# Altium PCB PCBPIC80_A3979_4lvl.PcbDoc (part 1 of 2)
Units mm, origin at the board's own origin, x right, y up, seen from the top; angles counter-clockwise.
Board outline 150.1 x 100.1 mm, 4 copper layers (Top Layer, InternalPlane1, InternalPlane2, Bottom Layer); 110 components, 115 nets, 451 pads, 191 vias.
Unrouted connection lines stored in the file: 6.
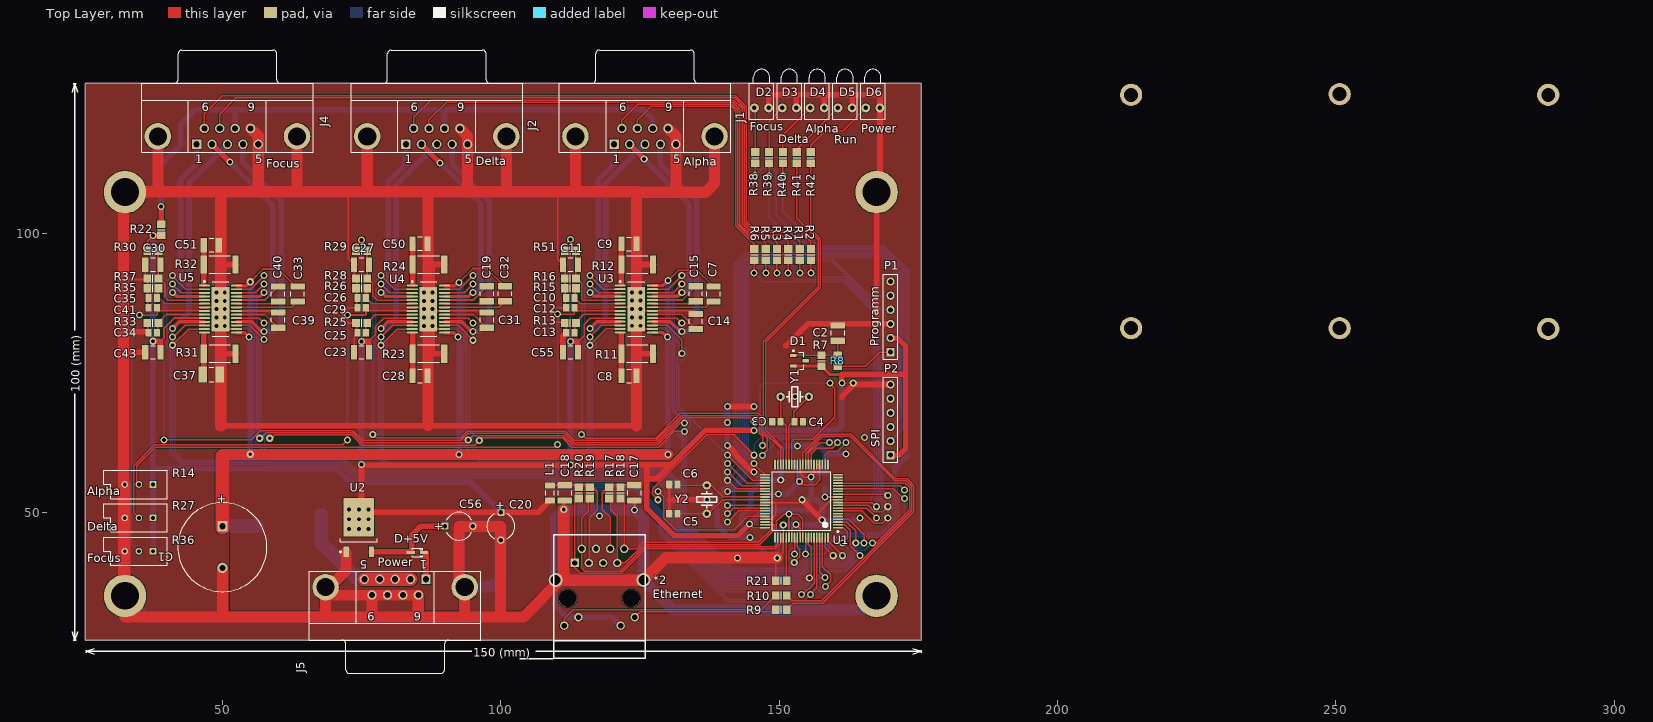
[diagram p0: Top Layer view]
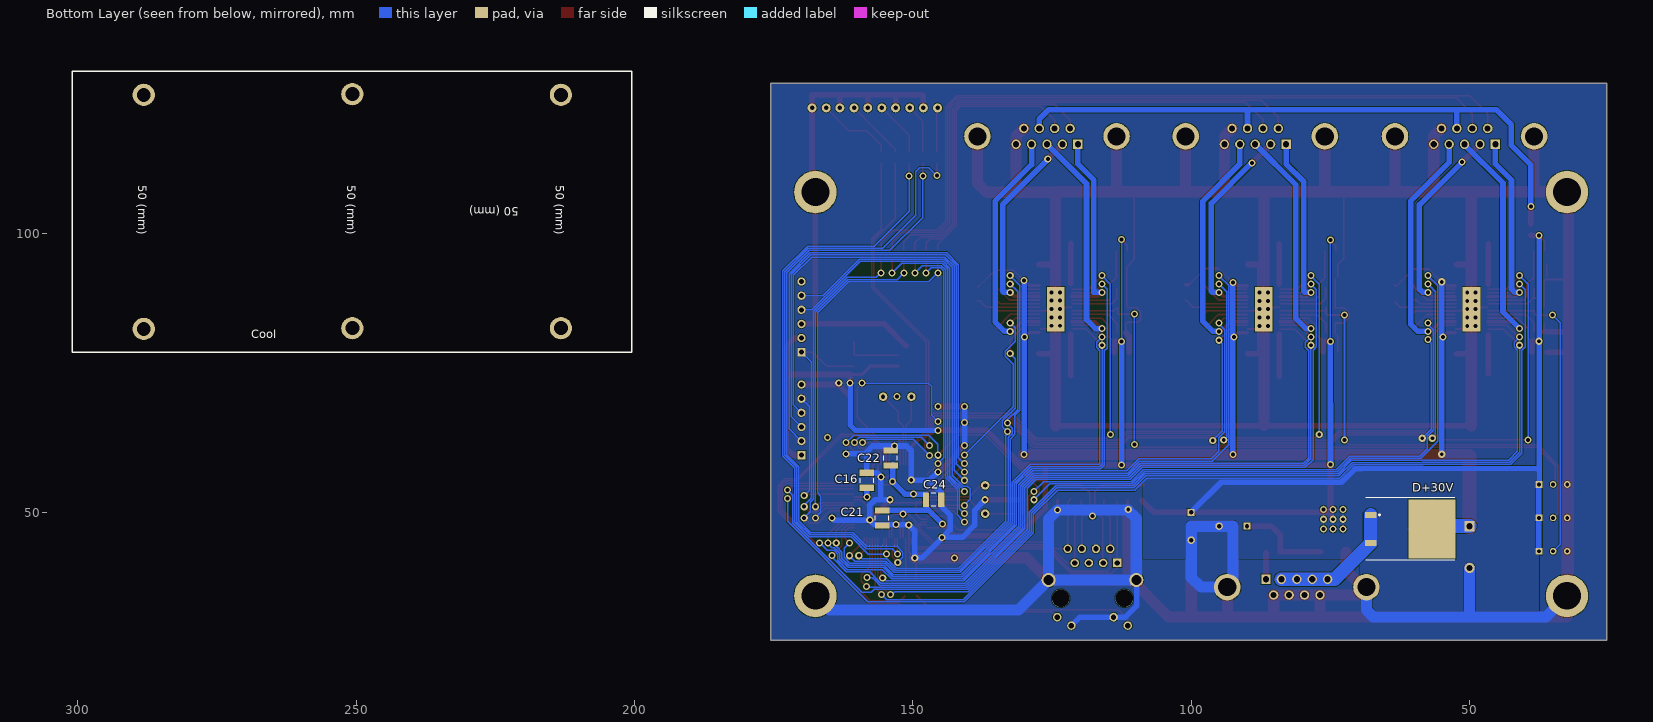
[diagram p1: Bottom Layer view, seen from below]
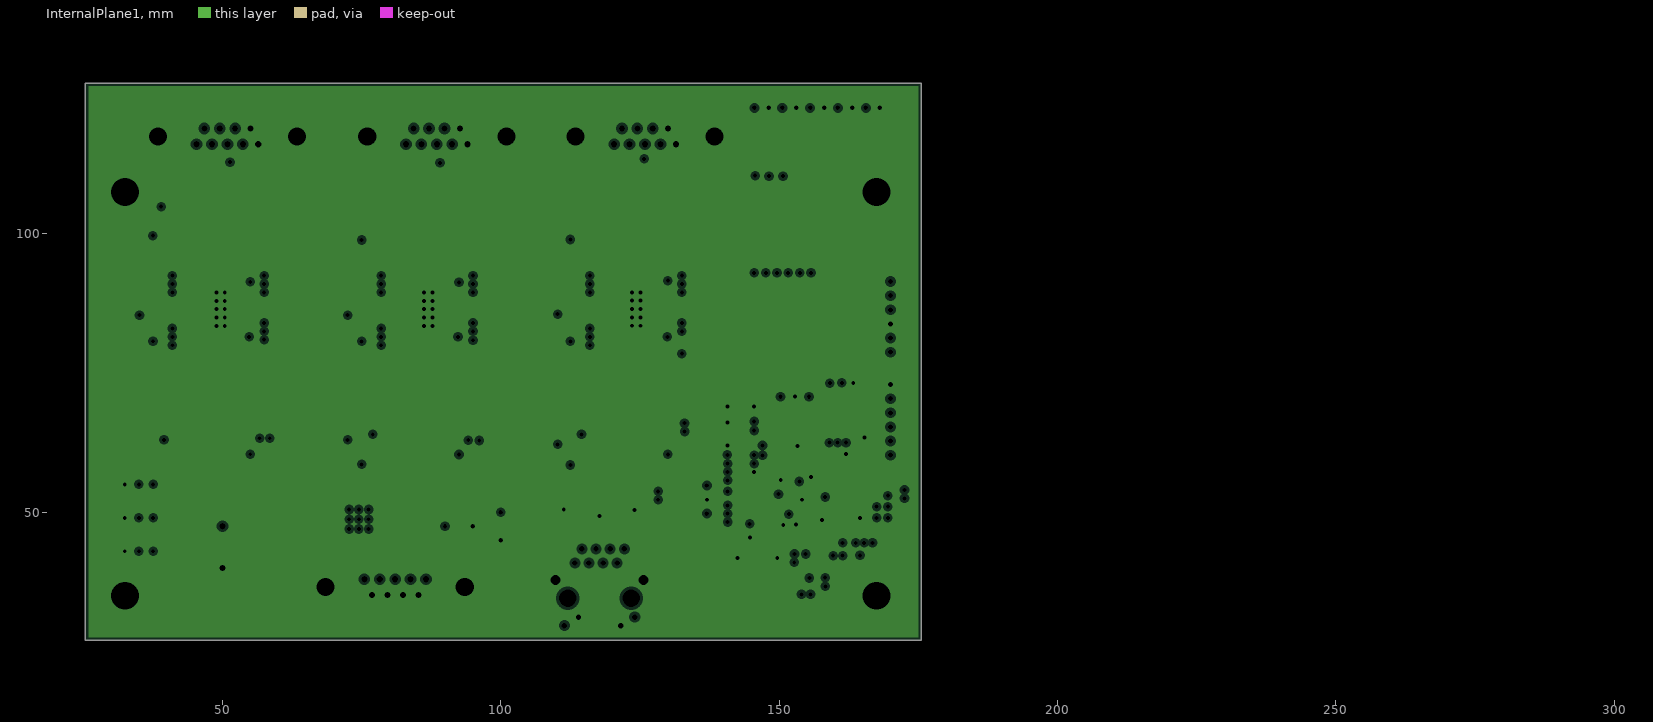
[diagram p2: InternalPlane1, clearances drawn from the general rule]
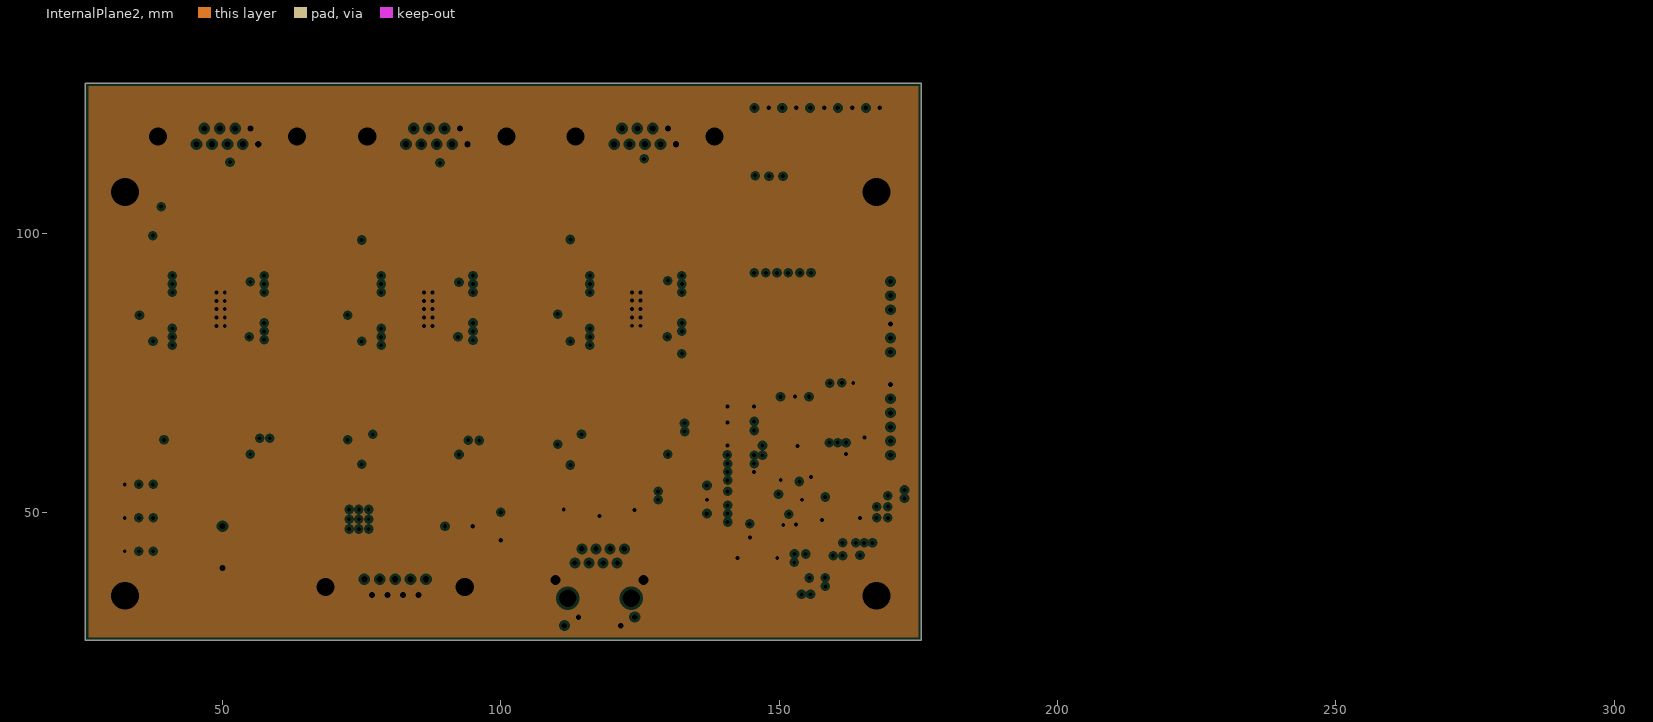
[diagram p3: InternalPlane2, clearances drawn from the general rule]

## Layer stack, top to bottom
Top Layer: signal copper 0.0356
Dielectric: prepreg 0.32, FR-4, Dk 4.8
InternalPlane1: plane copper 0.0356, net GND
Dielectric: core 0.32, FR-4, Dk 4.8
InternalPlane2: plane copper 0.0356, net GND
Dielectric: prepreg 0.32, FR-4, Dk 4.8
Bottom Layer: signal copper 0.0356

## Board outline
25.4,127.1 25.4,27 175.5,27 175.5,127.1 25.4,127.1

## Design rules (kind name [scope] priority, off if disabled: settings)
Clearance [All] p1: gap=0.127
PlaneClearance [All] p1: clearance=0.508
PlaneConnect [All] p1: planeconnectstyle=Relief reliefexpansion=0.508 reliefentries=4 reliefconductorwidth=0.254 reliefairgap=0.254
PolygonConnect [All] p1: connectstyle=Relief reliefconductorwidth=0.254 reliefentries=4 polygonreliefangle="90 Angle"
RoomDefinition SheetPIC80_A9379 [InComponentClass('SheetPIC80_A9379')] p1: confinementstyle=ConfineOut formatcopy=TRUE lockcomponents=FALSE outline 179,26.8 198.9,26.8 198.9,33.6 179,33.6
RoutingVias [All] p1: holewidth=0.711 width=1.27 viastyle="Through Hole" minholewidth=0.711 minwidth=1.27 maxholewidth=0.711 maxwidth=1.27
SilkscreenOverComponentPads [All] p1: minsilkscreentomaskgap=0.254
SolderMaskExpansion [All] p1: expansion=0.102
Width [All] p1: maxlimit=2.54 minlimit=0.254 preferedwidth=0.254
25 further rules are at their usual default settings.

## Components (designator, comment, footprint, x,y, rotation, side; value= is the part's Value field where it differs from the comment)
*2 "LU1T516-43" EthernetCON 117.729,34.544 r270 top
C1 "Cap Pol1" CAPPR7.5-16x35 50,43.75 r270 top
C2 "Cap" CAPC3225L 160.528,82.169 r270 top
C3 "Cap" CAPC2012L 149.5,66.25 r180 top
C4 "Cap" CAPC2012L 153.5,66.25 r180 top
C5 "Cap" CAPC2012L 131,49.75 r180 top
C6 "Cap" CAPC2012L 131,55 r0 top
C7 "Cap" CAPC3225L 138.2,89.2 r90 top
C8 "Cap" CAPC3225L 123,74.5 r180 top
C9 "Cap" CAPC3225L 123,98.2 r180 top
C10 "Cap" CAPC2012L 112.5,88.5 r0 top
C11 "Cap" CAPC3225L 112.5,94.5 r0 top
C12 "Cap" CAPC2012L 112.5,86.75 r0 top
C13 "Cap" CAPC2012L 112.5,82.25 r0 top
C14 "Cap" CAPC3225L 135,84.25 r270 top
C15 "Cap" CapC3225L 135,89.25 r270 top
C16 "Cap" CAPC3225L 158.25,55.75 r90 bottom
C17 "Cap" CAPC3225L 124,53.5 r90 top
C18 "Cap" CAPC3225L 111.5,53.5 r90 top
C19 "Cap" CAPC3225L 100.75,89.25 r90 top
C20 "Cap Pol1" CAPPR5-5x5 100,47.5 r270 top
C21 "Cap" CAPC3225L 155.5,49 r270 bottom
C22 "Cap" CAPC3225L 154,59.75 r90 bottom
C23 "Cap" CAPC3225L 75,78.75 r180 top
C24 "Cap" CAPC3225L 146.25,52.25 r180 bottom
C25 "Cap" CAPC2012L 75,82.25 r0 top
C26 "Cap" CAPC2012L 75,88.5 r0 top
C27 "Cap" CAPC3225L 75,94.5 r0 top
C28 "Cap" CAPC3225L 85.5,74.5 r180 top
C29 "Cap" CAPC2012L 75,86.75 r0 top
C30 "Cap" CAPC3225L 37.5,94.5 r0 top
C31 "Cap" CAPC3225L 97.5,84.5 r270 top
C32 "Cap" CAPC3225L 97.5,89.25 r270 top
C33 "Cap" CAPC3225L 63.5,89.2 r90 top
C34 "Cap" CAPC2012L 37.5,82.25 r0 top
C35 "Cap" CAPC2012L 37.5,88.5 r0 top
C37 "Cap" CAPC3225M 48,74.75 r180 top
C39 "Cap" CAPC3225L 60,84.5 r270 top
C40 "Cap" CAPC3225L 60,89.2 r270 top
C41 "Cap" CAPC2012L 37.5,86.75 r0 top
C43 "Cap" CAPC3225L 37.5,78.75 r180 top
C50 "Cap" CAPC3225L 85.5,98.25 r180 top
C51 "Cap" CAPC3225L 48,98 r180 top
C55 "Cap" CAPC3225L 112.5,78.75 r180 top
C56 "Cap Pol1" CAPPR5-5x5 92.5,47.5 r0 top
Cool "Cooler" "PCBComponent_1 - duplicate" 200.75,79 r0 bottom
D1 "Diode" SOT95P240-3N 153.67,77.216 r0 top
D2 "Focus" LED-1 146.825,122.625 r90 top
D3 "Delta" LED-1 151.825,122.625 r90 top
D4 "Alpha" LED-1 156.825,122.625 r90 top
D5 "Error" LED-1 161.825,122.625 r90 top
D6 "Power/run" LED-1 166.825,122.625 r90 top
D+5V "D Schottky" SOD-323 85,42.75 r0 top
D+30V "MBRB1545CT" D2PAK 62.25,47 r270 bottom
J1 "D Connector 9" D-SUB-9 125.9,116.1 r0 top
J2 "D Connector 9" D-SUB-9 88.5,116.1 r0 top
J4 "D Connector 9" D-SUB-9 50.9,116.1 r0 top
J5 "D Connector 9" D-SUB-9 81.026,37.973 r180 top
L1 "Inductor" INDC3216AL 108.839,53.467 r90 top
P1 "Программатор" HDR1X6 170,78.75 r90 top
P2 "SPI" HDR1X6 170,60.25 r90 top
R1 "Res2" RESC2012M 153.67,96.266 r270 top
R2 "Res2" RESC2012M 155.702,96.266 r270 top
R3 "Res2" RESC2012M 149.606,96.266 r270 top
R4 "Res2" RESC2012M 151.638,96.266 r270 top
R5 "Res2" RESC2012M 147.574,96.266 r270 top
R6 "Res2" RESC2012M 145.542,96.266 r270 top
R7 "Res2" RESC2012M 157.607,77.216 r270 top
R8 "Res2" RESC2012M 160.528,77.216 r90 top
R9 "Res2" RESC2012M 150.368,32.512 r180 top
R10 "Res2" RESC2012M 150.368,35.052 r180 top
R11 "Res2" RESC6332L 124.5,78.5 r180 top
R12 "Res2" RESC6332L 124.5,94.5 r180 top
R13 "Res2" RESC2012M 112.5,84 r0 top
R14 "RPot" VR5 35,55 r180 top
R15 "Res2" RESC2012M 112.5,90.25 r0 top
R16 "Res2" RESC2012M 112.5,92 r0 top
R17 "Res2" RESC2012M 119.5,53.5 r270 top
R18 "Res2" RESC2012M 121.5,53.5 r270 top
R19 "Res2" RESC2012M 116,53.5 r270 top
R20 "Res2" RESC2012M 114,53.5 r270 top
R21 "Res2" RESC2012M 150.368,37.719 r0 top
R22 "Res2" RESC2012M 39,100.75 r90 top
R23 "Res2" RESC6332L 87,78.5 r180 top
R24 "Res2" RESC6332L 87,94.5 r180 top
R25 "Res2" RESC2012M 75,84 r0 top
R26 "Res2" RESC2012M 75,90.25 r0 top
R27 "RPot" VR5 35,49 r180 top
R28 "Res2" RESC2012M 75,92 r0 top
R29 "Res2" RESC2012M 75,97 r0 top
R30 "Res2" RESC2012M 37.5,97 r0 top
R31 "Res2" RESC6332L 49.5,78.5 r180 top
R32 "Res2" RESC6332L 49.5,94.5 r180 top
R33 "Res2" RESC2012M 37.5,84 r0 top
R35 "Res2" RESC2012M 37.5,90.25 r0 top
R36 "RPot" VR5 35,43 r180 top
R37 "Res2" RESC2012M 37.5,92 r0 top
R38 "Res2" RESC2012M 145.675,113.7 r90 top
R39 "Res2" RESC2012M 148.175,113.7 r90 top
R40 "Res2" RESC2012M 150.675,113.7 r90 top
R41 "Res2" RESC2012M 153.175,113.7 r90 top
R42 "Res2" RESC2012M 155.675,113.7 r90 top
R51 "Res2" RESC2012M 112.5,97 r0 top
U1 "PIC18F87J60-I/PT" TQFP-PT80_N 154,52 r180 top
U2 "LM1117DT-3.3" TD03B_N 74.5,47.25 r90 top
U3 "A3979" "TSOP65P640_HS-28AM - duplicate" 124.339,86.501 r0 top
U4 "A3979" "TSOP65P640_HS-28AM - duplicate" 86.995,86.487 r0 top
U5 "A3979" "TSOP65P640_HS-28AM - duplicate" 49.657,86.487 r0 top
Y1 "XTAL" Quartz 150.25,70.75 r0 top
Y2 "XTAL" Quartz 137,49.75 r90 top

## Footprints (in the part's own frame and the unit in brackets; to place one, negate y for a bottom-side part, rotate by r counter-clockwise, add the part's x,y. Pads: shape width x height; smd on the part's side, far side on the other; paste and mask are expansions set on the pad)
CAPC2012L [mm] "Chip Capacitor, Body 2.0x1.3mm, IPC High Density"
  rect 1.1x1.4 smd: 1(-0.75,0) 2(0.75,0)
  body extent -1.1,-0.72 1.1,0.72, height 1.4
CAPC3225L [mm] "Chip Capacitor, Body 3.2x2.5mm, IPC High Density"
  rect 1.1x2.6 smd: 1(-1.35,0) 2(1.35,0)
  silkscreen extent -0.4,-1.2 0.4,1.2, body extent -1.7,-1.35 1.7,1.35, height 1.5
CapC3225L [mm] "Chip Capacitor, Body 3.2x2.5mm, IPC High Density"
  rect 1.1x2.6 smd: 1(-1.35,0) 2(1.35,0)
  silkscreen extent -0.4,-1.2 0.4,1.2, body extent -1.7,-1.35 1.7,1.35, height 1.5
CAPC3225M [mm] "Chip Capacitor, Body 3.2x2.5mm, IPC Low Density"
  rect 1.5x2.8 smd: 1(-1.55,0) 2(1.55,0)
  silkscreen extent -0.4,-1.3 0.4,1.3, body extent -1.7,-1.35 1.7,1.35, height 1.5
CAPPR5-5x5 [mm] "Capacitor, Electrolytic, Radial; Body 5 x 5 mm (Dia.xH typ); Pin Spacing 5 mm (typ)"
  rect 1.25x1.25 hole 0.75: 1(-2.5,0)
  round 1.35 hole 0.8: 2(2.5,0)
  silkscreen extent -2.26,-2.5 2.27,2.5
CAPPR7.5-16x35 [mm] "Capacitor, Electrolytic, Radial; Body 16 x 35 mm (Dia.xH typ); Pin Spacing 7.5 mm (typ)"
  rect 1.85x1.85 hole 1.1: 1(-3.75,0)
  round 1.85 hole 1.1: 2(3.75,0)
  silkscreen extent -8,-8 8,8
D2PAK [mm] "D2-PAK/TO-263-AB; 3 Leads (1 Cropped); Body 15.5 (inc. leads) x 10.5 mm (LxW max)"
  rect 1.05x2 smd: 1(-2.54,-5.5) 3(2.54,-5.5)
  rect 10.55x8.4 smd: 2(0,5.5)
  silkscreen extent -5.58,-6.4 5.58,9.6
D-SUB-9 [mm] "Connector"
  rect 1.69x1.69 hole 1.09: 1(-5.54,0)
  round 1.69 hole 1.09: 2(-2.77,0) 3(0,0) 4(2.77,0) 5(5.54,0) 6(-4.155,2.84) 7(-1.385,2.84) 8(1.385,2.84) 9(4.155,2.84)
  round 4.76 hole 3.26: 10(-12.495,1.42) 11(12.495,1.42)
  silkscreen extent -15.4,-1.48 15.4,16.92, body extent -15.49,-1.52 15.49,17.02, height 6.35
EthernetCON [mil] "Ethernet connector w/two LEDs"
  rect 60x60 hole 38: 1(-250,-175)
  round 60 hole 38: 2(-350,-125) 3(-250,-75) 4(-350,-25) 5(-250,25) 6(-350,75) 7(-250,125) 8(-350,175) 9(193,-249) 10(133,-149) 11(193,149) 12(133,249)
  round 100 hole 70: 13(-130,-310) 14(-130,310)
  round 125 hole 125 unplated: 15(0,-225) 16(0,225)
  silkscreen extent -450,-325 425,325, body extent -450,-325 425,325, height 550
HDR1X6 [mm] "Connector; Header; 6 Position"
  rect 1.5x1.5 hole 0.9: 1(0,0)
  round 1.5 hole 0.9: 2(2.54,0) 3(5.08,0) 4(7.62,0) 5(10.16,0) 6(12.7,0)
  silkscreen extent -1.27,-1.27 13.97,1.27
INDC3216AL [mm] "Chip Inductor, Body 3.2x1.6mm, IPC High Density"
  rect 1.1x1.8 smd: 1(-1.35,0) 2(1.35,0)
  silkscreen extent -0.4,-0.8 0.4,0.8, body extent -1.7,-0.9 1.7,0.9, height 0.55
LED-1 [mm] "Typical RED GaAs LED; 2 Leads"
  round 1.6 hole 0.8: 1(0,1.27) 2(0,-1.27)
  silkscreen extent -2,-2.2 6.95,2.2
"PCBComponent_1 - duplicate" [mm]
  round 4 hole 2.5: 1(12.446,-45.974) 2(49.911,-46.101) 3(87.376,-45.974) 4(87.376,-3.937) 5(49.911,-4.064) 6(12.446,-4.064)
  silkscreen extent -0.25,-50.25 100.25,0.25, body extent 0,-50.04 100.08,0, height 18
Quartz [mil]
  round 60 hole 30: 1(0,0) 2(200,0)
  silkscreen extent 40,-70 160,70, body extent -100,-100 300,100, height 90
RESC2012M [mm] "Chip Resistor, Body 2.0x1.2mm, IPC Low Density"
  rect 1.4x1.5 smd: 1(-1,0) 2(1,0)
  silkscreen extent 0,-0.65 0,0.65, body extent -1.07,-0.7 1.07,0.7, height 0.7
RESC6332L [mm] "Chip Resistor, Body 6.3x3.2mm, IPC High Density"
  rect 1.1x3.3 smd: 1(-2.85,0) 2(2.85,0)
  silkscreen extent -1.9,-1.55 1.9,1.55, body extent -3.22,-1.68 3.22,1.68, height 0.9
SOD-323 [mm] "SOD-323/SC-76; 2 Leads; Body 1.7 x 1.3 mm, (LxW)"
  rect 1.45x0.55 smd: 1(1.175,0) 2(-1.175,0)
  silkscreen extent -0.95,-0.75 0.95,0.75
SOT95P240-3N [mm] "SOT23, 3-Leads, Body 2.9x1.3mm, Pitch 0.95mm, Lead Span 2.4mm, IPC Medium Density"
  rect 1.15x0.6 smd: 1(-1.125,0.95) 2(-1.125,-0.95) 3(1.125,0)
  silkscreen extent -1.25,-1.5 0.7,1.92, body extent -0.7,-1.5 0.7,1.5, height 1.14
TD03B_N [mm] "D-PAK, 4-Leads, Body 6.1x6.6mm, Pitch 2.29mm, Lead Span 9.7mm, IPC Medium Density"
  rect 1.9x0.95 smd: 1(-4.35,2.28) 3(-4.35,-2.28)
  rect 6.9x5.5 smd: 4(1.85,0)
  silkscreen extent -4.47,-3.35 -2,3.43, body extent -2.5,-3.35 3.7,3.35, height 2.38
TQFP-PT80_N [mm] "Thin QFP, 80-Leads, Body 12x12mm, Pitch 0.5mm, IPC Medium Density"
  oval 1.8x0.3 smd: 1(-6.55,4.75) 2(-6.55,4.25) 3(-6.55,3.75) 4(-6.55,3.25) 5(-6.55,2.75) 6(-6.55,2.25) 7(-6.55,1.75) 8(-6.55,1.25) 9(-6.55,0.75) 10(-6.55,0.25) 11(-6.55,-0.25) 12(-6.55,-0.75) 13(-6.55,-1.25) 14(-6.55,-1.75) 15(-6.55,-2.25) 16(-6.55,-2.75) 17(-6.55,-3.25) 18(-6.55,-3.75) 19(-6.55,-4.25) 20(-6.55,-4.75) 41(6.55,-4.75) 42(6.55,-4.25) 43(6.55,-3.75) 44(6.55,-3.25) 45(6.55,-2.75) 46(6.55,-2.25) 47(6.55,-1.75) 48(6.55,-1.25) 49(6.55,-0.75) 50(6.55,-0.25) 51(6.55,0.25) 52(6.55,0.75) 53(6.55,1.25) 54(6.55,1.75) 55(6.55,2.25) 56(6.55,2.75) 57(6.55,3.25) 58(6.55,3.75) 59(6.55,4.25) 60(6.55,4.75)
  oval 0.3x1.8 smd: 21(-4.75,-6.55) 22(-4.25,-6.55) 23(-3.75,-6.55) 24(-3.25,-6.55) 25(-2.75,-6.55) 26(-2.25,-6.55) 27(-1.75,-6.55) 28(-1.25,-6.55) 29(-0.75,-6.55) 30(-0.25,-6.55) 31(0.25,-6.55) 32(0.75,-6.55) 33(1.25,-6.55) 34(1.75,-6.55) 35(2.25,-6.55) 36(2.75,-6.55) 37(3.25,-6.55) 38(3.75,-6.55) 39(4.25,-6.55) 40(4.75,-6.55) 61(4.75,6.55) 62(4.25,6.55) 63(3.75,6.55) 64(3.25,6.55) 65(2.75,6.55) 66(2.25,6.55) 67(1.75,6.55) 68(1.25,6.55) 69(0.75,6.55) 70(0.25,6.55) 71(-0.25,6.55) 72(-0.75,6.55) 73(-1.25,6.55) 74(-1.75,6.55) 75(-2.25,6.55) 76(-2.75,6.55) 77(-3.25,6.55) 78(-3.75,6.55) 79(-4.25,6.55) 80(-4.75,6.55)
  silkscreen extent -6.68,-5.25 5.25,5.57, body extent -6,-6 6,6, height 1.2
"TSOP65P640_HS-28AM - duplicate" [mm] "TSOP, 28-Leads, Body 9.7x4.4mm, Pitch 0.65mm, Exposed Pad, IPC Low Density"
  oval 2x0.35 smd: 1(-2.9,4.225) 2(-2.9,3.575) 3(-2.9,2.925) 4(-2.9,2.275) 5(-2.9,1.625) 6(-2.9,0.975) 7(-2.9,0.325) 8(-2.9,-0.325) 9(-2.9,-0.975) 10(-2.9,-1.625) 11(-2.9,-2.275) 12(-2.9,-2.925) 13(-2.9,-3.575) 14(-2.9,-4.225) 15(2.9,-4.225) 16(2.9,-3.575) 17(2.9,-2.925) 18(2.9,-2.275) 19(2.9,-1.625) 20(2.9,-0.975) 21(2.9,-0.325) 22(2.9,0.325) 23(2.9,0.975) 24(2.9,1.625) 25(2.9,2.275) 26(2.9,2.925) 27(2.9,3.575) 28(2.9,4.225)
  rect 3.15x8 all layers, no hole: 29(0,0)
  silkscreen extent -3.02,-4.9 1.5,5.07, body extent -2.25,-4.9 2.25,4.9, height 1.1
VR5 [mm] "Variable Resistor, Thru-Hole; 3 Leads"
  rect 1.2x1.2 hole 0.7: 1(-2.54,0)
  round 1.2 hole 0.7: 2(0,0) 3(2.54,0)
  silkscreen extent -5.08,-2.54 6.35,2.54

## Part data
C1 C20 C56: "Polarized Capacitor (Radial)"
C2 C3 C4 C5 C6 C7 C8 C9 C10 C11 C12 C13 C14 C15 C16 C17 C18 C19 C21 C22 C23 C24 C25 C26 C27 C28 C29 C30 C31 C32 C33 C34 C35 C37 C39 C40 C41 C43 C50 C51 C55: "Capacitor"
D1: "Default Diode"
D2 D3 D4 D5 D6: library part LED1, "Typical RED GaAs LED"
D+5V: "Schottky Diode"
D+30V: "Schottky Rectifier"
J1 J2 J4 J5: "Receptacle Assembly, 9 Position, Right Angle"
P1 P2: library part "Header 6", "Header, 6-Pin"
R1 R2 R3 R4 R5 R6 R7 R8 R9 R10 R11 R12 R13 R15 R16 R17 R18 R19 R20 R21 R22 R23 R24 R25 R26 R28 R29 R30 R31 R32 R33 R35 R37 R38 R39 R40 R41 R42 R51: "Resistor"
R14 R27 R36: "Potentiometer"
U1: "High Performance, 1-Mbit Flash Microcontroller with Ethernet, 128K Flash, 80-Pin TQFP, Industrial Temperature Range"
U2: "800mA Low-Dropout Linear Regulator"
U3 U4 U5: "Microstepping DMOS Driver with Translator 2.5A"
Y1 Y2: "Crystal Oscillator"

## Free pads (board coordinates)
  round 7.62 hole 5: 1(32.5,35) 1(32.5,107.5) 1(167.5,35) 1(167.5,107.5)

## Via types
v1: diameter 1.27, hole 0.711, Top Layer to Bottom Layer, 191 vias

## Nets (pads, with @x,y where several pads share a name; then routed paths per layer and width w, separated by ;. In a path a pad name is that pad's centre, name@x,y a point inside that pad or via, vN(x,y) a via of type N, cw(c..) or ccw(c..) an arc to the next point about the centre after c; other vN are vias at no path point)
+5: C56.1 D+5V.2 U2.3 | length 16.9
  Top Layer w1: U2.3@76.78,42.9 84,42.9 84,45.9 85.6,47.5 C56.1@90,47.5
+30: C1.1 C7.2 C19.2 C33.2 D+30V.2 U3.15 U3.28 U4.15 U4.28 U5.15 U5.28 | length 241.6
  Top Layer w0.3: v1@54.8,91.5 55.1,91.5 57.3,93.7 60.034,93.7 C33.2@63.192,90.542 ; v1@92.35,91.45 92.65,91.45 95,93.8 97.434,93.8 C19.2@100.384,90.85 ; v1(130,91.6) 131.9,93.5 135.234,93.5 C7.2@138.192,90.542
  Top Layer w0.35: C33.2@63.192,90.542 C33.2@63.5,90.85
  Top Layer w0.6: U5.15@52.557,82.262 54.038,82.262 v1(54.8,81.5) ; U5.28@52.557,90.712 54.312,90.712 v1@55.1,91.5 ; U4.15@89.895,82.262 91.538,82.262 v1(92.3,81.5) ; U4.28@89.895,90.712 91.762,90.712 v1@92.5,91.45 ; C19.2@100.384,90.85 C19.2@101,90.85 ; U3.15@127.239,82.276 129.124,82.276 129.8,81.6 v1(129.9,81.5) ; U3.28@127.239,90.726 129.126,90.726 v1(130,91.6)
  Top Layer w2: 50,60.1 50.3,60.4 v1(130,60.4)
  Top Layer w2.5: C1.1@50,47.3 50,60.1
  Bottom Layer w1: v1@55,60.7 v1@55,91.5 ; v1(92.3,81.5) v1@92.5,81.5 ; v1(92.5,60.375) v1@92.5,81.5 ; v1(92.5,91.3) v1@92.5,81.5 ; v1(129.9,81.5) v1@129.9,81.6 ; v1(130,60.4) v1(130,91.6)
  Bottom Layer w2.5: C1.1@50,47.56 D+30V.2@56.19,47.56
  other v1: 55,60.425 55,91.4
ALFA_OUT1A: J1.1 U3.4 | length 35
  Top Layer w0.6: v1(116,89.5) 116.724,88.776 U3.4@121.439,88.776
  Bottom Layer w1: v1(116,89.5) 116.285,89.5 117.473,89.5 117.473,109.673 120.36,112.56 J1.1@120.36,116.1
ALFA_OUT1B: J1.2 U3.25 | length 37.9
  Top Layer w0.6: U3.25@127.239,88.776 131.776,88.776 v1(132.5,89.5)
  Top Layer w1: J1.2@123.13,116.1 v1(125.755,113.475)
  Bottom Layer w1: v1(125.755,113.475) 125.755,113.351 133.873,105.233 133.873,89.673 133.7,89.5 v1(132.5,89.5)
ALFA_OUT2A: J1.3 U3.11 | length 43.9
  Top Layer w0.6: v1(116,83) 117.226,84.226 U3.11@121.439,84.226
  Bottom Layer w1: v1(116,83) 117.2,83 118.8,84.6 118.8,109 J1.3@125.9,116.1
ALFA_OUT2B: J1.4 U3.18 | length 44
  Top Layer w0.6: U3.18@127.239,84.226 130.474,84.226 132.2,82.5 v1(132.5,82.5) v1(132.5,82.5)
  Bottom Layer w1: J1.4@128.67,116.1 128.67,112.43 135.2,105.9 135.2,84.2 133.5,82.5 v1(132.5,82.5)
ALPHA_LED: D4.1 R40.2 | length 9.9
  Top Layer w0.254: R40.2@150.675,114.7 150.675,117.745 D4.1@155.555,122.625
DELTA_LED: D3.1 R39.2 | length 8.9
  Top Layer w0.254: R39.2@148.175,114.7 148.175,120.245 D3.1@150.555,122.625
DELTA_OUT1A: J2.1 U4.4 | length 35
  Top Layer w0.6: v1(78.5,89.5) 79.238,88.762 U4.4@84.095,88.762
  Bottom Layer w1: v1(78.5,89.5) 79.6,89.5 79.773,89.673 79.773,109.373 82.96,112.56 J2.1@82.96,116.1
DELTA_OUT1B: J2.2 U4.25 | length 38
  Top Layer w0.6: U4.25@89.895,88.762 94.262,88.762 v1(95,89.5)
  Top Layer w1: J2.2@85.73,116.1 v1(89.08,112.75)
  Bottom Layer w0.6: J2.2@85.73,116.1 J2.2@85.73,116.352
  Bottom Layer w1: v1@89.048,112.802 96.373,105.477 96.373,89.673 96.2,89.5 v1(95,89.5)
DELTA_OUT2A: J2.3 U4.11 | length 43.9
  Top Layer w0.6: v1(78.5,83) 79.712,84.212 U4.11@84.095,84.212
  Bottom Layer w1: v1(78.5,83) 79.4,83 81.2,84.8 81.2,108.8 J2.3@88.5,116.1
DELTA_OUT2B: J2.4 U4.18 | length 44
  Top Layer w0.6: U4.18@89.895,84.212 92.988,84.212 94.7,82.5 94.969,82.5 v1(95,82.5)
  Bottom Layer w1: J2.4@91.27,116.1 91.27,112.53 97.9,105.9 97.9,84.3 96.1,82.5 v1(95,82.5)
DIRALFA: U1.17 U3.3 | length 132.9
  Top Layer w0.254: v1(116,91) 117.574,89.426 U3.3@121.439,89.426 ; U1.17@160.55,55.25 161.65,55.25 168.415,55.25 170.585,55.25 172.672,55.25 173.438,54.484 173.438,50.438 167.5,44.5 v1(166.75,44.5)
  Bottom Layer w0.254: v1(116,91) 115.1,90.1 115.1,79.5 115.6,79 115.6,58.447 116.247,57.8 128.658,57.8 131.375,55.083 131.375,47.631 140.962,38.044 153.795,38.044 155.457,39.706 161.78,39.706 163.496,41.422 163.496,42.503 164.132,43.139 165.389,43.139 v1(166.75,44.5)
DIRDELTA: U1.16 U4.3 | length 169.9
  Top Layer w0.254: v1(78.5,91) 80.088,89.412 U4.3@84.095,89.412 ; U1.16@160.55,54.75 171.75,54.75 v1(172.5,54)
  Bottom Layer w0.254: v1(78.5,91) 77.5,90 77.5,79.7 78.1,79.1 78.1,59.472 79.513,58.059 95.701,58.059 108.786,58.059 108.878,57.967 110.95,55.895 127.869,55.895 129.47,54.294 129.47,46.842 140.173,36.139 154.584,36.139 156.961,36.139 157.5,35.6 159.161,35.6 171.6,48.039 171.6,53.1 v1(172.5,54)
DIRFOCUS: U1.15 U5.3 | length 205.1
  Top Layer w0.254: v1(41,91) 42.588,89.412 U5.3@46.757,89.412 ; U1.15@160.55,54.25 170.507,54.25 171.138,53.619 172.257,52.5 v1(172.5,52.5)
  Bottom Layer w0.254: v1(41,91) 40,90 40,79.7 40.6,79.1 40.6,60.647 42.647,58.6 58.284,58.6 58.33,58.554 70.912,58.554 73.312,56.154 94.912,56.154 107.997,56.154 110.161,53.99 124.01,53.99 128.327,49.673 128.327,46.369 140.745,33.95 158.05,33.95 172.5,48.4 v1(172.5,52.5)
ENABLE: U1.80 U3.26 U4.26 U5.26 | length 236.7
  Top Layer w0.254: U5.26@52.557,89.412 55.912,89.412 v1(57.5,91) ; v1@56.7,63.1 57.901,64.301 73.377,64.301 75.178,62.5 93.7,62.5 94.114,62.914 v1(94.15,62.95) 94.989,63.789 111.233,63.789 112.933,62.089 128.205,62.089 132.216,66.1 v1@133.1,66.1 ; U4.26@89.895,89.412 93.412,89.412 v1(95,91) ; U3.26@127.239,89.426 130.926,89.426 v1(132.5,91) ; U1.80@158.75,45.45 158.75,44.85 160.1,43.5 v1(161.4,42.2)
  Bottom Layer w0.254: v1@56.7,63.1 56.138,63.662 56.138,89.638 v1@57.071,90.571 ; v1@93.8,63.3 93.635,63.465 93.635,89.635 94.757,90.757 95,90.757 v1(95,91) ; v1(132.5,91) 131.181,89.681 131.181,68.458 133,66.639 v1(133,66) 132.124,65.124 132.124,64.145 132.645,63.624 132.651,63.624 132.899,63.376 132.899,48.262 141.593,39.568 153.164,39.568 154.07,40.474 154.826,41.23 158.769,41.23 160.43,41.23 v1(161.4,42.2)
  other v1: 56.7,63.3
ERROR_LED: D5.1 R41.2 | length 11
  Top Layer w0.254: R41.2@153.175,114.7 153.175,115.245 156.68,118.75 D5.1@160.555,122.625
FOCUS_LED: D2.1 R38.2 | length 7.8
  Top Layer w0.254: R38.2@145.675,114.7 D2.1@145.675,122.505
FOCUS_OUT1A: J4.1 U5.4 | length 34.7
  Top Layer w0.6: v1(41,89.5) 41.738,88.762 U5.4@46.757,88.762
  Bottom Layer w1: v1@41.3,89.5 41.9,89.5 42.473,90.073 42.473,109.673 45.36,112.56 J4.1@45.36,116.1
FOCUS_OUT1B: J4.2 U5.25 | length 37.5
  Top Layer w0.6: U5.25@52.557,88.762 56.762,88.762 v1(57.5,89.5)
  Top Layer w1: J4.2@48.13,116.1 v1(51.355,112.875)
  Bottom Layer w1: v1@51.386,112.84 59,105.225 59,90.1 58.4,89.5 v1(57.5,89.5)
FOCUS_OUT2A: J4.3 U5.11 | length 43.5
  Top Layer w0.6: v1(41,83) 42.212,84.212 U5.11@46.757,84.212
  Bottom Layer w1: v1(41,83) 44,86 44,109.106 50.9,116.006 J4.3@50.9,116.1
FOCUS_OUT2B: J4.4 U5.18 | length 44.5
  Top Layer w0.6: U5.18@52.557,84.2 55.3,84.2 57,82.5 v1(57.5,82.5)
  Bottom Layer w1: J4.4@53.67,116.1 53.67,112.83 60.6,105.9 60.6,83.8 59.3,82.5 v1(57.5,82.5)
GND: *2.10 *2.11 *2.13 *2.14 C1.2 C2.1 C3.2 C4.1 C5.2 C6.1 C8.1 C9.1 C10.1 C11.1 C12.1 C13.1 C14.1 C16.2 C17.1 C18.1 C20.2 C21.2 C22.2 C23.2 C24.2 C25.1 C26.1 C27.1 C28.1 C29.1 C30.1 C31.1 C34.1 C35.1 C37.1 C39.1 C41.1 C43.2 C50.1 C51.1 C55.2 C56.2 Cool.1 Cool.2 Cool.3 Cool.4 Cool.5 Cool.6 D2.2 D3.2 D4.2 D5.2 D6.2 J1.5 J1.9 J1.10 J1.11 J2.5 J2.9 J2.10 J2.11 J4.5 J4.9 J4.10 J4.11 J5.6 J5.7 J5.8 J5.9 J5.10 J5.11 P1.3 P2.6 pad.1 R11.1 R12.1 R13.1 R14.3 R15.1 R16.1 R21.1 R23.1 R24.1 R25.1 R26.1 R27.3 R28.1 R31.1 R32.1 R33.1 R35.1 R36.3 R37.1 U1.11 U1.26 U1.31 U1.51 U1.57 U1.64 U1.67 U1.70 U2.1 U3.7 U3.16 U3.21 U3.29 U4.7 U4.16 U4.21 U4.29 U5.7 U5.16 U5.21 U5.29 | length 1476.3
  Top Layer w0.254: R37.1@36.15,92.35 C30.1@36.15,94.5 ; 50.5,78.5 U5.29@50.5,84 ; U5.29@50.5,89 50.5,94.5 ; U5.29@50.675,86.175 U5.21@52.4,86.175 ; C39.1@59.675,86.175 C39.1@60,85.85 ; 88,78.5 U4.29@88,84 ; U4.29@88,89 88,94.5 ; U4.29@88.175,86.175 89.9,86.175 97.175,86.175 C31.1@97.5,85.85 ; 110.2,107.32 110.2,95.45 111.6,94.05 111.6,92 C12.1@111.6,86.9 ; C12.1@111.489,86.489 111.278,86.7 109.8,86.7 109.1,86 109.1,84.6 109.6,84.1 111.5,84.1 R13.1@111.75,83.85 ; C13.1@111.75,82.25 R13.1@111.75,83.85 ; 111.75,83.1 R13.1@111.75,83.85 ; U3.7@121.439,86.826 U3.29@124.374,86.826 ; U3.29@124.526,82.926 U3.16@127.239,82.926 ; U3.29@124.576,86.176 U3.21@127.239,86.176 ; U3.21@127.239,86.175 134.675,86.175 C14.1@135,85.85 ; 148.55,48.75 149.4,49.6 149.4,51.75 153.575,51.75 ; R21.1@149.4,37.719 149.4,41.5 150.75,42.85 U1.64@150.75,45.45 ; v1(150.725,47.75) v1@150.75,47.725 ; 152.25,47.025 v1(153,47.775) 153.75,47.025 ; 153.75,57.05 154.475,56.325 155.675,56.325 v1(155.725,56.375) 156.25,56.9 ; 156.7,49.625 159.324,52.25 ; C2.1@160.528,83.619 C2.1@160.739,83.83
  Top Layer w0.3: 32,91.8 32.25,91.8 36.4,91.8 36.6,91.6 36.6,90.25 C41.1@36.6,86.75 ; C34.1@36.6,82.4 R33.1@36.6,84 ; U5.7@46.757,86.812 U5.29@49.332,86.812 ; U5.29@49.812,82.912 U5.16@52.557,82.912 ; 72.6,107.474 72.6,95.55 C27.1@73.65,94.5 R28.1@73.65,92.35 ; C23.2@73.65,78.75 73.65,81.65 C25.1@74.25,82.25 ; C25.1@74.1,82.4 74.1,84 72.61,84 71.588,85.022 71.588,85.778 72.56,86.75 C29.1@74.25,86.75 ; C29.1@74.1,86.9 R28.1@74.1,92 ; U4.7@84.095,86.812 U4.29@86.799,86.812 ; U4.29@87.023,82.912 U4.16@89.895,82.912 ; U1.57@147.45,48.75 148.55,48.75 ; U1.51@147.45,51.75 149.4,51.75 ; U1.64@150.75,45.45 v1@150.75,47.725 ; U1.67@152.25,45.45 152.25,47.025 ; U1.70@153.75,45.45 153.75,47.025 ; 153.75,57.05 U1.31@153.75,58.55 ; 156.25,56.9 U1.26@156.25,58.55 ; 159.324,52.25 U1.11@160.55,52.25
  Top Layer w0.35: U5.21@52.4,86.175 C39.1@59.675,86.175
  Top Layer w0.5: v1@111.379,50.579 C18.1@111.379,52.117 ; v1(124,50.4) C17.1@124,52.15 ; C5.2@130.25,49.75 C6.1@130.25,55
  Top Layer w1: 32.25,82.4 C34.1@36.6,82.4 ; 32.3,78.75 C43.2@36.15,78.75 ; 50.5,78.5 R31.1@52.35,78.5 ; 50.5,94.5 R32.1@52.35,94.5 ; 88,78.5 R23.1@89.85,78.5 ; 88,94.5 R24.1@89.85,94.5 ; C55.2@111.15,78.75 111.15,81.65 C13.1@111.75,82.25 ; 124.4,94.5 R12.1@127.35,94.5 ; 124.5,78.5 R11.1@127.35,78.5 ; 130.3,52.25 v1(137,52.25) ; v1(140.7,62) 140.785,62 141.962,60.823 141.962,60.503 144.977,57.488 145.262,57.488 v1(145.5,57.25) ; v1(140.7,69) v1(145.5,69) ; D2.2@148.095,122.625 148.095,124.795 148.3,125 168.1,125 D6.2@168.1,122.63 ; 151.2,79.9 155.13,83.83 P1.3@170,83.83 ; 153.095,124.795 D3.2@153.095,122.625 D3.2@153.2,122.73 ; v1(154.075,52.25) 156.7,49.625 v1(157.725,48.6) ; D4.2@158.095,122.625 158.095,124.995 ; 161.2,70.7 163.45,72.95 P2.6@170,72.95 ; D5.2@163.095,122.625 163.095,124.995 ; 167.5,83.93 pad.1@167.5,107.5 168.1,108.1 D6.2@168.1,122.63 ; D6.2@168.095,122.625 D6.2@168.1,122.63 ; 49.743,65.555 124.357,65.555 49.743,65.555
  Top Layer w2: pad.1@32.123,107.574 124.476,107.574 ; pad.1@32.25,35.25 32.25,55 32.25,91.8 pad.1@32.25,107.5 ; pad.1@32.46,35.04 R14.3@32.46,55 ; pad.1@32.5,35 32.5,31.225 50,31.225 ; 38.405,107.705 J4.10@38.405,117.52 ; 49.7,107.574 49.7,65.512 ; C1.2@50,39.94 50,31.225 ; J4.9@55.055,118.94 56.44,117.555 J4.5@56.44,116.1 56.44,107.614 ; 63.395,107.669 J4.11@63.395,117.52 ; 68.531,31.386 J5.11@68.531,36.553 ; U2.1@72.22,42.9 72.22,39.52 69.253,36.553 J5.11@68.531,36.553 ; 76.005,107.779 J2.10@76.005,117.52 ; 76.871,31.426 J5.9@76.871,35.133 ; 85.181,31.568 J5.6@85.181,35.133 J5.9@76.871,35.133 ; 86.911,65.564 86.911,107.5 ; J5.10@92.5,37.574 92.5,47.5 C56.2@95,47.5 100,47.5 100,31.4 ; J2.9@92.655,118.94 94.04,117.555 J2.5@94.04,116.1 94.04,107.514 ; J5.10@93.5,36.574 93.5,31.225 ; 100.995,107.769 J2.11@100.995,117.52 ; 104.1,31.225 93.5,31.225 ; 104.238,31.363 *2.13@110.671,37.796 ; *2.13@109.905,37.796 *2.13@110.671,37.796 ; v1(111.3,50.5) 111.3,37.846 110.721,37.846 *2.13@110.671,37.796 ; 113.405,107.579 J1.10@113.405,117.52 ; 124.4,107.2 124.4,65.512 ; 124.4,107.447 124.4,65.512 ; 124.4,107.474 136.774,107.474 138.395,109.095 J1.11@138.395,117.52 ; J1.9@130.055,118.94 131.44,117.555 J1.5@131.44,116.1 131.44,107.614 ; v1(149.65,41.825) v1(142.5,41.825) 129.582,41.825 *2.14@125.603,37.846 125.553,37.796 *2.13@110.671,37.796 ; 49.7,65.512 49.743,65.555 49.7,65.512 ; 50,31.225 93.5,31.225 ; J5.11@68.531,36.553 69.951,35.133 J5.9@76.871,35.133 ; 124.4,65.512 124.357,65.555 124.4,65.512
  Bottom Layer w1: *2.13@109.799,37.79 109.799,33.201 111.834,31.166 *2.10@113.944,31.166 119.99,31.166 *2.11@121.514,29.642 ; v1(137,52.25) 138.9,50.35 138.9,47.7 141.1,45.5 v1@144.7,45.5 ; v1(140.7,62) v1(140.7,66.1) v1(140.7,69) ; v1(144.75,45.5) v1@144.7,45.5 ; v1(145.5,57.25) 146.975,55.775 ; v1(154.075,52.25) 155.625,52.25 ; 158.6,60.5 v1(162,60.5) ; v1(164.5,49) 164.1,48.6 v1(157.725,48.6) ; v1@144.7,45.5 143.3,46.9 143.3,49.5 144.9,51.1 C24.2@144.9,52.25 144.9,53.6 147.075,55.775 v1(150.275,55.775) 150.275,61.046 151.129,61.9 v1(153.3,61.9) 157.2,61.9 158.25,60.85 C16.2@158.25,57.1 156.45,57.1 v1(155.725,56.375) 155.725,52.35 155.625,52.25 ; v1@144.7,45.5 148.375,41.825 v1(149.65,41.825) 149.65,46.675 v1(150.725,47.75) 156.875,47.75 v1(157.725,48.6) ; 155.625,52.25 156.75,52.25 157.725,51.275 v1(157.725,48.6)
  Bottom Layer w2: pad.1@32.5,35 36.3,31.2 50,31.2 ; C1.2@50,39.94 50,31.2 ; J5.11@68.531,36.553 68.531,32.431 67.3,31.2 50,31.2 ; J5.10@92.5,37.574 92.5,47.5 100,47.5 100,38.3 98.253,36.553 J5.10@93.521,36.553 ; pad.1@167.5,35 164.947,32.447 131.002,32.447 *2.14@125.603,37.846 ; *2.14@125.603,37.846 125.603,48.797 v1(124,50.4) 111.4,50.4 109.855,48.855 *2.13@109.855,37.846 *2.14@125.603,37.846
  other v1: 117.75,49.325 165.3,63.4 152.8,70.8 163.3,73.2 48.895,83.487 50.419,83.487 86.233,83.487 87.757,83.487 123.577,83.501 125.101,83.501 48.895,84.987 50.419,84.987 86.233,84.987 87.757,84.987 123.577,85.001 125.101,85.001 48.895,86.487 50.419,86.487 86.233,86.487 87.757,86.487 123.577,86.501 125.101,86.501 48.895,87.987 50.419,87.987 86.233,87.987 87.757,87.987 123.577,88.001 125.101,88.001 48.895,89.487 50.419,89.487 86.233,89.487 87.757,89.487 123.577,89.501 125.101,89.501
HOME_ALFA: U1.27 U4.2 | length 136.1
  Top Layer w0.254: v1(77,64) 77.59,63.41 92.814,63.41 93.955,64.551 111.549,64.551 113.2,62.9 127.939,62.9 132.42,67.381 146.019,67.381 146.395,67.005 146.395,64.239 147,63.634 v1(147,62) ; v1(78.5,92.5) 80.938,90.062 U4.2@84.095,90.062 ; U1.27@155.75,58.55 155.75,60.55 156.7,61.5 159.5,61.5 v1(160.5,62.5)
  Bottom Layer w0.254: v1(77,64) 77,91 v1(78.5,92.5) ; v1(147,62) 148.481,63.481 159.619,63.481 160.257,62.843 160.257,62.5 v1(160.5,62.5)
HOME_DELTA: U1.28 U3.2 | length 98.1
  Top Layer w0.254: v1(114.5,64) 115.217,63.283 127.783,63.283 132.262,67.762 146.238,67.762 146.776,67.224 146.776,64.396 147.889,63.283 147.889,61.114 v1(147,60.225) ; v1(116,92.5) 118.424,90.076 U3.2@121.439,90.076 ; U1.28@155.25,58.55 155.25,60.589 157.161,62.5 v1(159,62.5)
  Bottom Layer w0.254: v1(114.5,64) 114.5,91 v1(116,92.5) ; v1(147,60.225) 149.875,63.1 158.4,63.1 158.7,62.8 v1(159,62.5)
HOME_FOCUS: U1.34 U5.2 | length 187.9
  Top Layer w0.254: v1(39.5,63) 55.143,63 56.825,64.682 73.534,64.682 75.316,62.9 92.843,62.9 94.113,64.17 111.391,64.17 113.091,62.47 128.048,62.47 132.578,67 144.8,67 v1(145.5,66.3) ; v1(41,92.5) 43.438,90.062 U5.2@46.757,90.062 ; U1.34@152.25,58.55 152.25,62.75 152.6,63.1 156,63.1 160,67.1 160,72.3 v1(159.1,73.2)
  Bottom Layer w0.254: v1(39.5,63) 39.5,91 v1(41,92.5) ; v1@145.8,66 v1(145.5,66.3) 146.6,67.4 146.6,72.6 147.2,73.2 v1(159.1,73.2)